# Altium PCB PCB.PcbDoc
Units mil, origin at the board's own origin, x right, y up, seen from the top; angles counter-clockwise.
Board outline 6000 x 4000 mil, 2 copper layers (Top Layer, Bottom Layer); 75 components, 67 nets, 266 pads, 0 vias.
Unrouted connection lines stored in the file: 1.
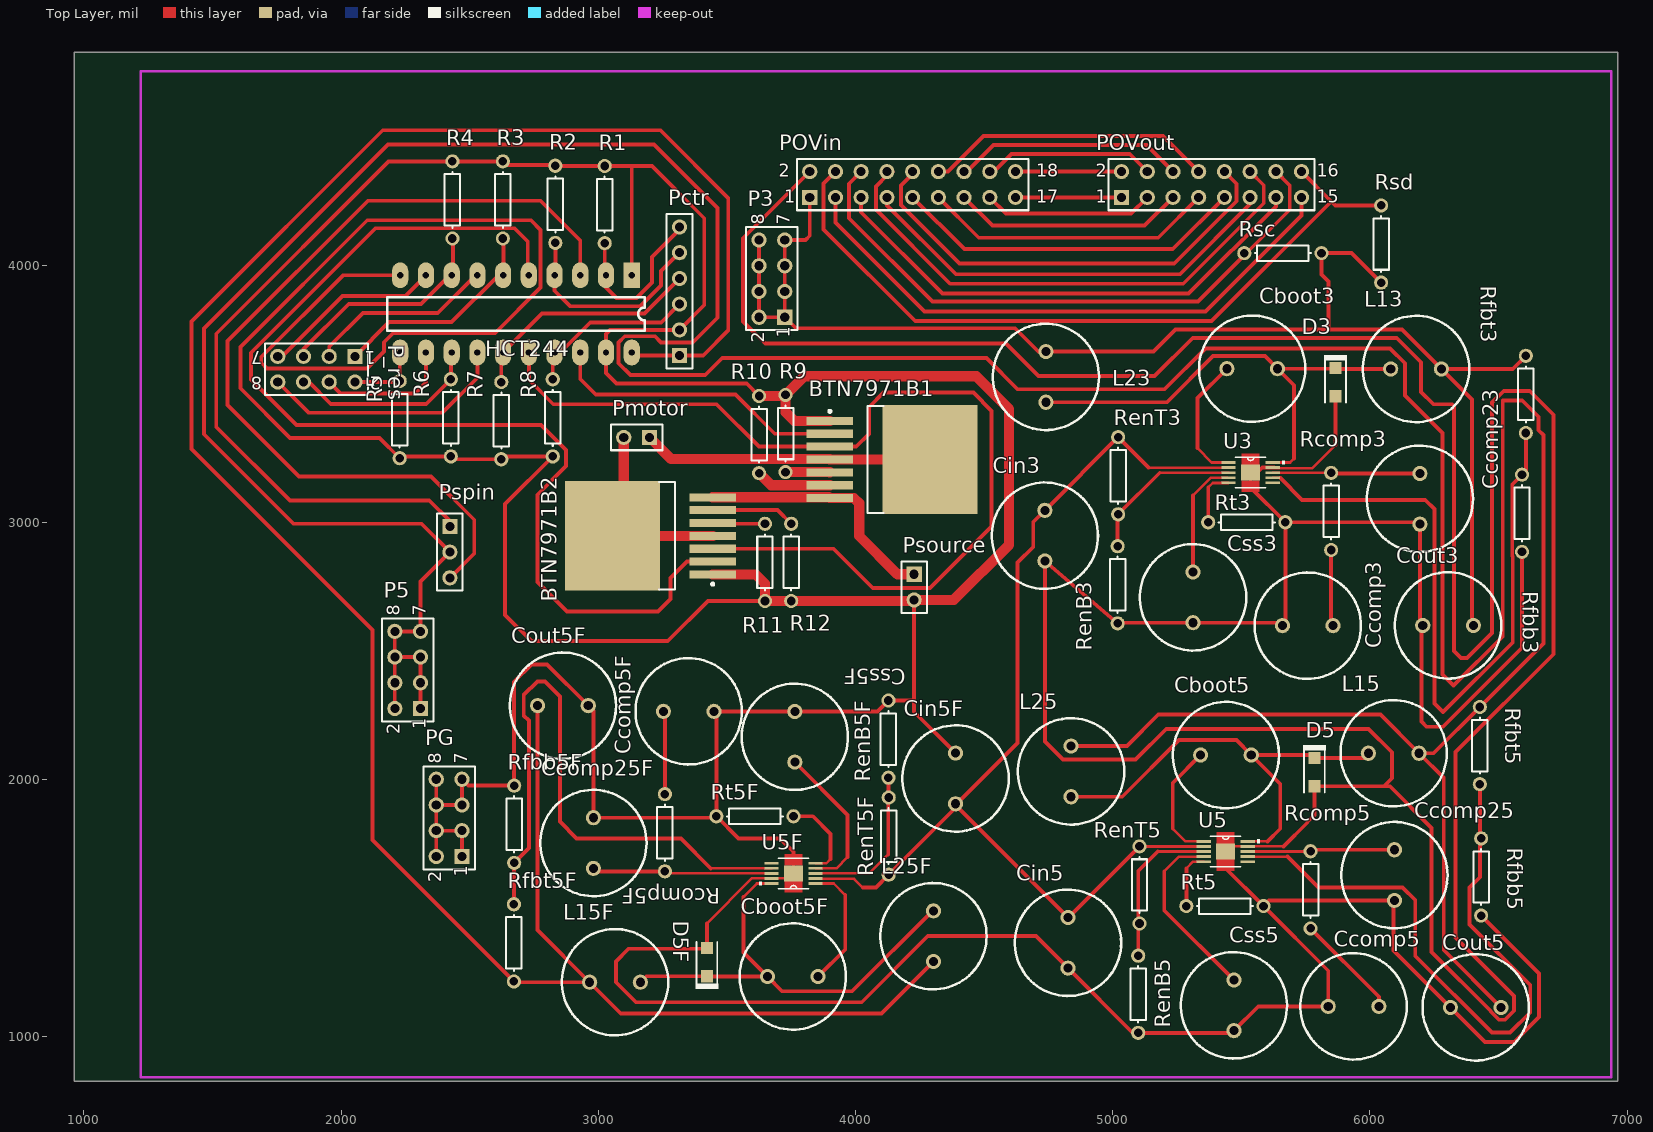
[diagram p0: Top Layer view]
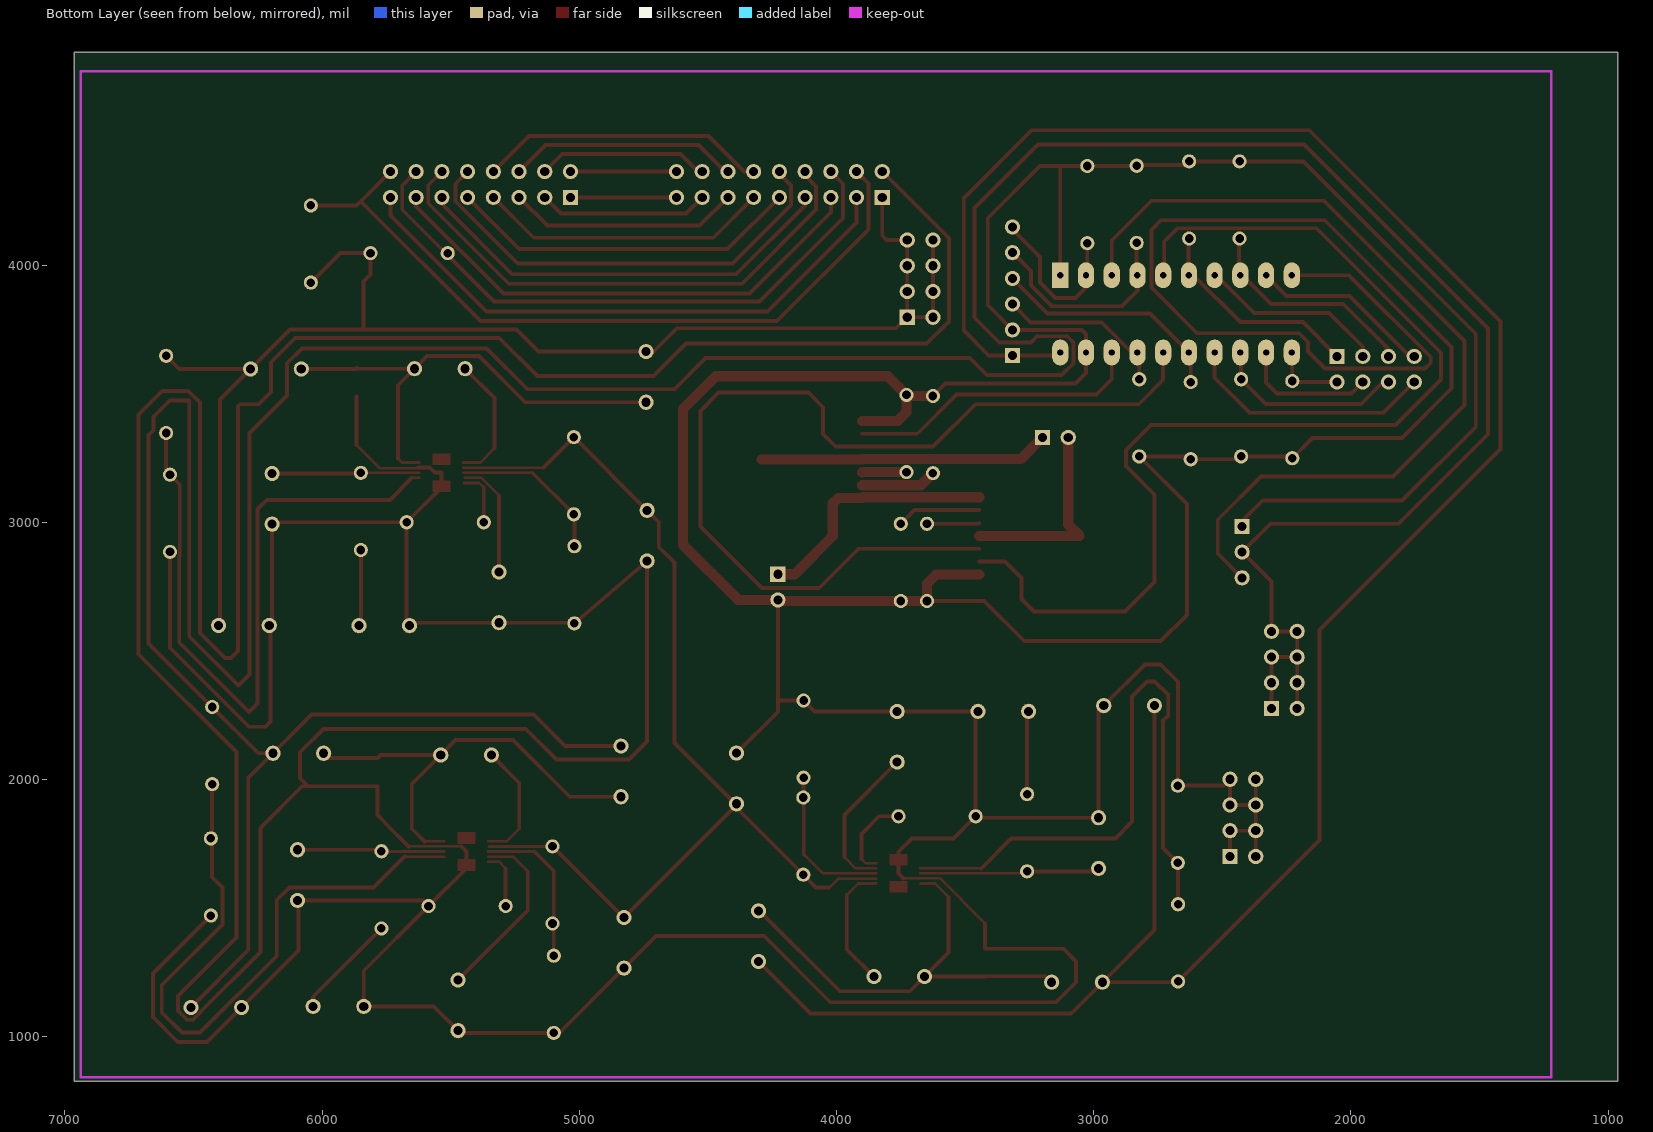
[diagram p1: Bottom Layer view, seen from below]

## Layer stack, top to bottom
Top Solder: solder mask 0.4, Solder Resist, Dk 3.5
Top Layer: signal copper 1.4
Dielectric 1: dielectric 12.6, FR-4, Dk 4.8
Bottom Layer: signal copper 1.4
Bottom Solder: solder mask 0.4, Solder Resist, Dk 3.5

## Board outline
963,828 6963,828 6963,4828 963,4828

## Design rules (kind name [scope] priority, off if disabled: settings)
Clearance [All] p1: gap=3 ignorepadtopadclearanceinfootprint=FALSE
PolygonConnect [All] p1: connectstyle=Relief reliefconductorwidth=10 reliefentries=4 polygonreliefangle="90 Angle" airgapwidth=10
RoomDefinition Motor [InComponentClass('Motor')] p1: confinementstyle=ConfineIn formatcopy=TRUE lockcomponents=FALSE outline 0,0 2000,0 2000,1000 0,1000
RoomDefinition connector [InComponentClass('connector')] p2: confinementstyle=ConfineIn formatcopy=TRUE lockcomponents=FALSE outline 0,0 2000,0 2000,1000 0,1000
RoomDefinition 5F [InComponentClass('5F')] p3: confinementstyle=ConfineIn formatcopy=TRUE lockcomponents=FALSE outline 0,0 2000,0 2000,1000 0,1000
RoomDefinition 5 [InComponentClass('5')] p4: confinementstyle=ConfineIn formatcopy=TRUE lockcomponents=FALSE outline 0,0 2000,0 2000,1000 0,1000
RoomDefinition 3V3 [InComponentClass('3V3')] p5: confinementstyle=ConfineIn formatcopy=TRUE lockcomponents=FALSE outline 0,0 2000,0 2000,1000 0,1000
RoutingLayers [All] p1: top layer_v5=TRUE bottom layer_v5=FALSE
RoutingVias [All] p1: holewidth=28 width=50 viastyle="Through Hole" minholewidth=28 minwidth=50 maxholewidth=28 maxwidth=50
SolderMaskExpansion [All] p1: expansion=4
Width [All] p1: maxlimit=50 minlimit=10 preferedwidth=15 bottomlayer_maxwidth=10 bottomlayer_prefwidth=10 minimp=50.000000 maximp=50.000000 favimp=50.000000
29 further rules are at their usual default settings.

## Classes and differential pairs
component class connector: P3 P5 PG POVin POVout Psource Rsc Rsd
component class Motor: BTN7971B1 BTN7971B2 HCT244 P_res Pctr Pmotor Pspin R1 R2 R3 R4 R5 R6 R7 R8 R9 R10 R11 R12
component class 3V3: Cboot3 Ccomp3 Ccomp23 Cin3 Cout3 Css3 D3 L13 L23 Rcomp3 RenB3 RenT3 Rfbb3 Rfbt3 Rt3 U3
component class 5: Cboot5 Ccomp5 Ccomp25 Cin5 Cout5 Css5 D5 L15 L25 Rcomp5 RenB5 RenT5 Rfbb5 Rfbt5 Rt5 U5
component class 5F: Cboot5F Ccomp5F Ccomp25F Cin5F Cout5F Css5F D5F L15F L25F Rcomp5F RenB5F RenT5F Rfbb5F Rfbt5F Rt5F U5F

## Components (designator, comment, footprint, x,y, rotation, side; value= is the part's Value field where it differs from the comment)
BTN7971B1 "BTN" BTN7971B 4142.36,3245 r0 top
BTN7971B2 "BTN" BTN7971B 3202.64,2948 r180 top
Cboot3 "Cap" RB5-10.5 5542,3598 r0 top value=100nF
Cboot5 "Cap" RB5-10.5 5440,2096 r0 top value=100nF
Cboot5F "Cap" RB5-10.5 3756,1235 r180 top value=100nF
Ccomp3 "Cap" RB5-10.5 5758,2599 r0 top value=1nF
Ccomp5 "Cap" RB5-10.5 5936,1119 r0 top value=1nF
Ccomp5F "Cap" RB5-10.5 3351.43,2266 r180 top value=1nF
Ccomp23 "Cap" RB5-10.5 6194,3092 r90 top value=10pF
Ccomp25 "Cap" RB5-10.5 6095,1629.43 r90 top value=10pF
Ccomp25F "Cap" RB5-10.5 2981,1754 r270 top value=10pF
Cin3 "Cap Pol1" RB5-10.5 4736,2949 r270 top value=470uF
Cin5 "Cap Pol1" RB5-10.5 4826,1366 r270 top value=470uF
Cin5F "Cap Pol1" RB5-10.5 4389,2005 r90 top value=470uF
Cout3 "Cap Pol1" RB5-10.5 6303.57,2600 r180 top value=470uF
Cout5 "Cap Pol1" RB5-10.5 6411,1115 r180 top value=470uF
Cout5F "Cap Pol1" RB5-10.5 2862.57,2288 r0 top value=470uF
Css3 "Cap" RB5-10.5 5312,2709 r90 top value=6.8nF
Css5 "Cap" RB5-10.5 5471,1123 r90 top value=6.8nF
Css5F "Cap" RB5-10.5 3764,2167 r270 top value=6.8nF
D3 "SS24FL" SOD-123F 5866,3546 r270 top value=Value
D5 "SS24FL" SOD-123F 5784,2029.88 r270 top value=Value
D5F "SS24FL" SOD-123F 3422,1291 r90 top value=Value
HCT244 "HCT244" DIP20 3130,3961 r270 top
L13 "Inductor" RB5-10.5 6179,3597 r0 top value=100uH
L15 "Inductor" RB5-10.5 6092,2103 r0 top value=100uH
L15F "Inductor" RB5-10.5 3065,1213 r180 top value=100uH
L23 "Inductor" RB5-10.5 4740,3566 r90 top value=100uH
L25 "Inductor" RB5-10.5 4838,2032.43 r90 top value=100uH
L25F "Inductor" RB5-10.5 4303,1392 r270 top value=100uH
P3 "Header 4X2" HDR2X4 3725,3798 r90 top
P5 "Header 4X2" HDR2X4 2309,2277 r90 top
P_res "Header 4X2" HDR2X4 2054,3646 r180 top
Pctr "Header 6" HDR1X6 3316,3649 r90 top
PG "Header 4X2" HDR2X4 2470,1702 r90 top
Pmotor "Header 2" HDR1X2 3199,3331 r180 top
POVin "Header 9X2" HDR2X9 3822,4264 r0 top
POVout "Header 8X2" HDR2X8 5034,4264 r0 top
Psource "Header 2" HDR1X2 4228,2799 r270 top
Pspin "Header 3" HDR1X3 2423,2985 r270 top
R1 "Res1" AXIAL-0.3 3025,4236 r270 top value=1K
R2 "Res1" AXIAL-0.3 2833,4237 r270 top value=1K
R3 "Res1" AXIAL-0.3 2629,4254 r270 top value=1K
R4 "Res1" AXIAL-0.3 2433,4254 r270 top value=1K
R5 "Res1" AXIAL-0.3 2228,3400 r90 top value=1K
R6 "Res1" AXIAL-0.3 2427,3407 r90 top value=1K
R7 "Res1" AXIAL-0.3 2623,3396 r90 top value=1K
R8 "Res1" AXIAL-0.3 2823,3407 r90 top value=1K
R9 "Res1" AXIAL-0.3 3728,3346 r270 top value=1K
R10 "Res1" AXIAL-0.3 3625,3342 r270 top value=1K
R11 "Res1" AXIAL-0.3 3648,2845 r90 top value=1K
R12 "Res1" AXIAL-0.3 3750,2845 r90 top value=1K
Rcomp3 "Res1" AXIAL-0.3 5849,3043 r90 top value=33K
Rcomp5 "Res1" AXIAL-0.3 5769,1572 r90 top value=56K
Rcomp5F "Res1" AXIAL-0.3 3259,1794 r270 top value=56K
RenB3 "Res1" AXIAL-0.3 5019,2758 r90 top value=33K
RenB5 "Res1" AXIAL-0.3 5099,1166 r90 top value=33K
RenB5F "Res1" AXIAL-0.3 4128,2158 r270 top value=33K
RenT3 "Res1" AXIAL-0.3 5021,3182 r90 top value=110K
RenT5 "Res1" AXIAL-0.3 5104,1591 r90 top value=110K
RenT5F "Res1" AXIAL-0.3 4129,1781 r270 top value=110K
Rfbb3 "Res1" AXIAL-0.3 6591,3036 r90 top value=10k
Rfbb5 "Res1" AXIAL-0.3 6432,1622 r90 top value=10k
Rfbb5F "Res1" AXIAL-0.3 2673,1827 r270 top value=10k
Rfbt3 "Res1" AXIAL-0.3 6606,3498 r90 top value=33k
Rfbt5 "Res1" AXIAL-0.3 6427,2133 r90 top value=56k
Rfbt5F "Res1" AXIAL-0.3 2672,1366 r270 top value=56k
Rsc "Res1" AXIAL-0.3 5661.42,4047.24 r0 top value=1K
Rsd "Res1" AXIAL-0.3 6043.31,4082.68 r270 top value=1K
Rt3 "Res1" AXIAL-0.3 5521,3001 r180 top value=110K
Rt5 "Res1" AXIAL-0.3 5436,1509 r180 top value=110K
Rt5F "Res1" AXIAL-0.3 3609,1858 r0 top value=110K
U3 "TPS54160DGQR" S-PDSO-G10-1 5536,3194 r0 top value=Value
U5 "TPS54160DGQR" S-PDSO-G10-1 5439,1721 r0 top value=Value
U5F "TPS54160DGQR" S-PDSO-G10-1 3759,1636 r180 top value=Value

## Footprints (in the part's own frame and the unit in brackets; to place one, negate y for a bottom-side part, rotate by r counter-clockwise, add the part's x,y. Pads: shape width x height; smd on the part's side, far side on the other; paste and mask are expansions set on the pad)
AXIAL-0.3 [mm] "Axial Device, Thru-Hole; 2 Leads; 0.3 in Pin Spacing"
  round 1.4 hole 0.85: 1(-3.81,0) 2(3.81,0)
  silkscreen extent -2.77,-0.76 2.77,0.76
BTN7971B [mm]
  rect 4.6x0.8 smd: 1(-6.15,3.81) 2(-6.15,2.54) 3(-6.15,1.27) 4(-6.15,0) 5(-6.15,-1.27) 6(-6.15,-2.54) 7(-6.15,-3.81)
  rect 9.4x10.8 smd: 8(3.75,0)
  silkscreen extent -6.27,-5.3 -0.85,5.3
DIP20 [mm]
  rect 2.54x1.6 hole 0.635: 1(0,0)
  oval 2.54x1.6 hole 0.635: 2(0,-2.54) 3(0,-5.08) 4(0,-7.62) 5(0,-10.16) 6(0,-12.7) 7(0,-15.24) 8(0,-17.78) 9(0,-20.32) 10(0,-22.86) 11(7.62,-22.86) 12(7.62,-20.32) 13(7.62,-17.78) 14(7.62,-15.24) 15(7.62,-12.7) 16(7.62,-10.16) 17(7.62,-7.62) 18(7.62,-5.08) 19(7.62,-2.54) 20(7.62,0)
  silkscreen extent 2.16,-24.13 5.46,1.27
HDR1X2 [mm] "Connector; Header; 2 Position"
  rect 1.5x1.5 hole 0.9: 1(0,0)
  round 1.5 hole 0.9: 2(2.54,0)
  silkscreen extent -1.27,-1.27 3.81,1.27
HDR1X3 [mm] "Connector; Header; 3 Position"
  rect 1.5x1.5 hole 0.9: 1(0,0)
  round 1.5 hole 0.9: 2(2.54,0) 3(5.08,0)
  silkscreen extent -1.27,-1.27 6.35,1.27
HDR1X6 [mm] "Connector; Header; 6 Position"
  rect 1.5x1.5 hole 0.9: 1(0,0)
  round 1.5 hole 0.9: 2(2.54,0) 3(5.08,0) 4(7.62,0) 5(10.16,0) 6(12.7,0)
  silkscreen extent -1.27,-1.27 13.97,1.27
HDR2X4 [mm] "Connector; Header; 4x2 Position"
  rect 1.5x1.5 hole 0.9: 1(0,0)
  round 1.5 hole 0.9: 2(0,2.54) 3(2.54,0) 4(2.54,2.54) 5(5.08,0) 6(5.08,2.54) 7(7.62,0) 8(7.62,2.54)
  silkscreen extent -1.27,-1.27 8.89,3.81
HDR2X8 [mm] "Connector; Header; 8x2 Position"
  rect 1.5x1.5 hole 0.9: 1(0,0)
  round 1.5 hole 0.9: 2(0,2.54) 3(2.54,0) 4(2.54,2.54) 5(5.08,0) 6(5.08,2.54) 7(7.62,0) 8(7.62,2.54) 9(10.16,0) 10(10.16,2.54) 11(12.7,0) 12(12.7,2.54) 13(15.24,0) 14(15.24,2.54) 15(17.78,0) 16(17.78,2.54)
  silkscreen extent -1.27,-1.27 19.05,3.81
HDR2X9 [mm] "Connector; Header; 9x2 Position"
  rect 1.5x1.5 hole 0.9: 1(0,0)
  round 1.5 hole 0.9: 2(0,2.54) 3(2.54,0) 4(2.54,2.54) 5(5.08,0) 6(5.08,2.54) 7(7.62,0) 8(7.62,2.54) 9(10.16,0) 10(10.16,2.54) 11(12.7,0) 12(12.7,2.54) 13(15.24,0) 14(15.24,2.54) 15(17.78,0) 16(17.78,2.54) 17(20.32,0) 18(20.32,2.54)
  silkscreen extent -1.27,-1.27 21.59,3.81
RB5-10.5 [mm] "Capacitor (Radial); 2 Leads"
  round 1.5 hole 0.9: 1(-2.5,0) 2(2.5,0)
  silkscreen extent -5.25,-5.25 5.25,5.25
S-PDSO-G10-1 [mm]
  rect 1.411x0.27 smd: 1(-2.175,1) 2(-2.175,0.5) 3(-2.175,0) 4(-2.175,-0.5) 5(-2.175,-1) 6(2.175,-1) 7(2.175,-0.5) 8(2.175,0) 9(2.175,0.5) 10(2.175,1)
  rect 1.88x1.57 smd paste-0.927: 11(0,0)
  Top Layer region: -0.889,0.762 0.889,0.762 0.889,1.905 -0.889,1.905
  Top Layer region: -0.889,-1.905 0.889,-1.905 0.889,-0.762 -0.889,-0.762
  silkscreen extent -1.5,-1.5 3.39,1.5
SOD-123F [mm]
  rect 1.2x1.2 smd paste-0.05 mask+0.051: 1(-1.4,0) 2(1.4,0)
  silkscreen extent -2.64,-1.12 2.01,1.12

## Part data
Cboot3 Cboot5 Cboot5F Ccomp3 Ccomp5 Ccomp5F Ccomp23 Ccomp25 Ccomp25F Css3 Css5 Css5F: "Capacitor", LatestRevisionDate=17-Jul-2002, LatestRevisionNote="Re-released for DXP Platform.", PackageDescription="Radial Cap, Thru-Hole; 2 Leads; 0.3 in Pin Spacing", PackageReference=RAD-0.3, Published=8-Jun-2000, Publisher="Altium Limited"
Cin3 Cin5 Cin5F Cout3 Cout5 Cout5F: "Polarized Capacitor (Radial)", LatestRevisionDate=17-Jul-2002, LatestRevisionNote="Re-released for DXP Platform.", PackageDescription="Polarized Capacitor (Radial); 2 Leads", PackageReference=RB7.6-15, Published=8-Jun-2000, Publisher="Altium Limited"
D3 D5 D5F: "Imported", Manufacturer_Name="Fairchild Semiconductor", Manufacturer_Part_Number=SS24FL, RefDes=RefDes, TYPE=TYPE, Vendor="Fairchild Semiconductor"
P3 P5 P_res PG: "Header, 4-Pin, Dual row", LatestRevisionDate=17-Jul-2002, LatestRevisionNote="Re-released for DXP Platform.", Publisher="Altium Limited"
Pctr: "Header, 6-Pin", LatestRevisionDate=17-Jul-2002, LatestRevisionNote="Re-released for DXP Platform.", Publisher="Altium Limited"
Pmotor Psource: "Header, 2-Pin", LatestRevisionDate=17-Jul-2002, LatestRevisionNote="Re-released for DXP Platform.", Publisher="Altium Limited"
POVin: "Header, 9-Pin, Dual row", LatestRevisionDate=17-Jul-2002, LatestRevisionNote="Re-released for DXP Platform.", Publisher="Altium Limited"
POVout: "Header, 8-Pin, Dual row", LatestRevisionDate=17-Jul-2002, LatestRevisionNote="Re-released for DXP Platform.", Publisher="Altium Limited"
Pspin: "Header, 3-Pin", LatestRevisionDate=17-Jul-2002, LatestRevisionNote="Re-released for DXP Platform.", Publisher="Altium Limited"
R1 R2 R3 R4 R5 R6 R7 R8 R9 R10 R11 R12 Rcomp3 Rcomp5 Rcomp5F RenB3 RenB5 RenB5F RenT3 RenT5 RenT5F Rfbb3 Rfbb5 Rfbb5F Rfbt3 Rfbt5 Rfbt5F Rsc Rsd Rt3 Rt5 Rt5F: "Resistor", LatestRevisionDate=17-Jul-2002, LatestRevisionNote="Re-released for DXP Platform.", PackageDescription="Axial Device, Thru-Hole; 2 Leads; 0.3 in Pin Spacing", PackageReference=AXIAL-0.3, Published=8-Jun-2000, Publisher="Altium Limited"
U3 U5 U5F: "Imported", Manufacturer_Name="Texas Instruments", Manufacturer_Part_Number=TPS54140DGQR, RefDes=RefDes, TYPE=TYPE, Vendor="Texas Instruments"
L13 L15 L15F L23 L25 L25F: Code_IEC=1005, Code_JEITA=0402, LatestRevisionDate=29-May-2009, LatestRevisionNote="IPC-7351 Footprint Added.", PackageDescription="Chip Inductor", PackageReference=0402-A, Published=8-Jun-2000, Publisher="Altium Limited"

## Nets (pads, with @x,y where several pads share a name; then routed paths per layer and width w, separated by ;. In a path a pad name is that pad's centre, name@x,y a point inside that pad or via, vN(x,y) a via of type N, cw(c..) or ccw(c..) an arc to the next point about the centre after c; other vN are vias at no path point)
3V3: Cout3.1 L13.2 L23.2 P3.1 P3.2 P3.3 P3.4 P3.5 P3.6 P3.7 P3.8 POVin.1 Rfbt3.2 Rsc.2 Rsd.2 | length 5636.1
  Top Layer w15: P3.8 P3.6 P3.4 P3.2 P3.1 ; POVin.1 3822,4115 3805,4098 P3.7 P3.5 P3.3 P3.1 ; Rsd.2 5928.74,4047.24 Rsc.2 5811.42,3964.17 5838.58,3937.01 5838.58,3753.94 5842.52,3750 ; Cout3.1@6396.43,2609 6396.43,3478 L13.2 ; Rfbt3.2 6555,3597 L13.2 ; P3.1 3768,3755 4620,3755 4710.57,3664.43 L23.2 5158.43,3664.43 5244,3750 5842.52,3750 ; 5842.52,3750 6124.43,3750 L13.2
5: Cout5.1 L15.2 L25.2 P5.1 P5.2 P5.3 P5.4 P5.5 P5.6 P5.7 P5.8 Pspin.2 Rfbt5.2 | length 16019.1
  Top Layer w15: P5.2 P5.4 P5.6 ; P5.1 P5.3 P5.5 P5.6 ; L25.2 5054.85,2130.85 5177,2253 6040.43,2253 L15.2 ; Cout5.1 6287,1337.43 6287,2006.43 L15.2 ; P5.6 P5.8 P5.7 2309,2771 Pspin.2 2313,2995 1815,2995 1467,3343 1467,3754 2182,4469 3217,4469 3463,4223 3463,3796 3367,3700 3244,3700 3220,3724 3103,3724 3079,3700 3079,3619 3125,3573 3416,3573 3482,3639 4509,3639 4630,3518 5201,3518 5360,3677 6078,3677 6136,3619 6136,3494 6282.5,3347.5 6282.5,2408.5 6325,2366 6516,2557 6516,3474 6592,3474 6655,3411 6655,3358.89 6674,3339.89 6674,2530 Rfbt5.2 6247,2103 L15.2
5F: Cout5F.1 HCT244.20 L15F.2 L25F.2 Pctr.1 Rfbt5F.2 | length 9449.4
  Top Layer w15: Cout5F.1 2764.15,1415.43 L15F.2 ; HCT244.20 3142,3649 Pctr.1 3408,3649 3505,3746 3505,4262 3242,4525 2162,4525 1418,3781 1418,3286 2122,2582 2122,1766 Rfbt5F.2 2675,1213 L15F.2 ; L25F.2 4101.43,1092 3087.57,1092 L15F.2
GND: BTN7971B1.1 BTN7971B2.1 Ccomp3.1 Ccomp5.1 Ccomp5F.1 Ccomp23.1 Ccomp25.1 Ccomp25F.1 Cin3.2 Cin5.2 Cin5F.2 Cout3.2 Cout5.2 Cout5F.2 Css3.1 Css5.1 Css5F.1 D3.2 D5.2 D5F.2 HCT244.1 HCT244.10 HCT244.19 Pctr.2 PG.1 PG.2 PG.3 PG.4 PG.5 PG.6 PG.7 PG.8 POVin.2 Psource.2 Pspin.1 R1.1 R2.1 R3.1 R4.1 R5.1 R6.1 R7.1 R8.1 R9.1 R10.1 R11.1 R12.1 RenB3.1 RenB5.1 RenB5F.1 Rfbb3.1 Rfbb5.1 Rfbb5F.1 Rt3.1 Rt5.1 Rt5F.1 U3.9 U3.11 U5.9 U5.11 U5F.9 U5F.11 | length 44856
  Top Layer w10: 3422,1442 3596.32,1616.32 U5F.11@3739.32,1616.32 ; U5.11@5458.69,1740.68 U5.9 5663.69,1740.68 ; U3.9@5629.4,3211.69 5775.8,3211.69 5866,3301.88
  Top Layer w15: HCT244.10 2008,3961 1690,3643 1690,3621 1712,3599 2101,3599 2167,3665 2167,3701 2202,3736 2598,3736 2776,3914 2776,4137 2738,4175 2102,4175 1609,3682 1609,3522 1802,3329 2149,3329 R5.1 2235,3257 R6.1 2438,3246 R7.1 2634,3257 R8.1 2638,3072 2638,2641 2740,2539 3270,2539 3426,2695 R11.1 ; PG.2 PG.4 ; PG.8 PG.6 ; Pspin.1 2423,3006 2343,3086 1801,3086 1515,3372 1515,3734 2185,4404 R4.1 R3.1 2643,4390 2836,4390 2840,4386 R1.1 3130,4386 ; PG.1 PG.3 PG.4 ; HCT244.1 3130,4386 ; 3422,1442 D5F.2 3418.88,1343 3118,1343 3069,1294 3069,1213 3147,1135 4024,1135 4281,1392 4701.57,1392 Cin5.2 5077.57,1016 RenB5.1 5462.43,1016 Css5.1 5565.43,1119 Ccomp5.1 5837.57,1257.43 Rt5.1 ; Ccomp5F.1 Ccomp5F.1@3450.43,2265.43 ; R10.1 3577,3540 3071,3540 3030,3581 HCT244.19 3030,3733 3046,3749 Pctr.2 3412,3845 3412,4183 3209,4386 3130,4386 ; R9.1@3724,3492 R9.1 ; U5F.11@3739.32,1616.32 U5F.11 3759,1720 3707,1772 3545,1772 Rt5F.1 ; POVin.2@3826,4364 POVin.2 3563,4105 3563,3782 3649,3696 4585,3696 4712,3569 5162,3569 5311,3718 6104,3718 6199,3623 6199,3508 6247,3460 6319,3460 6327,3452 6327,2500 6354,2473 6377,2473 6475,2571 6475,3466 6520,3511 6621,3511 6713,3419 6713,2488 6333,2108 6333,1387 6560,1160 6560,1102 6525,1067 6500.82,1067 6469.4,1098.42 6469.4,1100.6 6239,1331 6239,1813 6077.24,1974.76 6053.76,1974.76 ; Psource.2 4228,2306 ; Cin5F.2 4228,2264.43 4228,2306 ; U5.11@5458.69,1740.68 U5.11 5439,1656 Rt5.1 ; U3.9@5627.4,3213.69 5581,3213.69 5561.31,3194 U3.11 5536,3136 Rt3.1 ; 5663.69,1740.69 5756,1833 5756,1835 5784,1863 D5.2 6053.76,1974.76 ; 5866,3301.88 D3.2 ; Rfbb5.1 6657,1247 6657,1077 6561,981 6446.57,981 Cout5.2 6091,1336.57 6091,1527 Ccomp25.1 5608,1531 Rt5.1 ; Rfbb3.1 6591,2513 6284,2206 6220,2206 6199.57,2226.43 6199.57,2609 6194,2614.57 Ccomp23.1 6186.57,3001 Rt3.1 ; PG.4 PG.6 ; PG.6 PG.5 PG.7 2495,1977 Rfbb5F.1 2673,2381 2740,2448 2801,2448 Cout5F.2 2981,2268 Ccomp25F.1 3453.43,1852.43 Rt5F.1 ; Ccomp5F.1@3450.43,2265.43 Css5F.1 4085.43,2265.43 RenB5F.1 4226,2308 4228,2306 ; Ccomp5F.1@3450.43,2265.43 3459,2256.85 Rt5F.1 ; Rt3.1 5671,2600.43 5660.57,2590 5640,2610.57 Css3.1 5021.57,2610.57 RenB3.1 Cin3.2 4736,2149 4806,2079 5089,2079 5208,2198 5994,2198 6085,2107 6085,2006 6053.76,1974.76
  Top Layer w40: BTN7971B2.1 3612,2798 3648,2762 R11.1 R12.1 4224,2695 Psource.2 4382,2699 4597,2914 4597,3441 4469,3569 3801,3569 R9.1 3728,3429 3762,3395 BTN7971B1.1 ; R10.1 R9.1@3724,3492
NetBTN7971B1_2: BTN7971B1.2 HCT244.18 | length 1161.5
  Top Layer w15: HCT244.18 2930,3558 2990,3498 3533,3498 3686,3345 BTN7971B1.2
NetBTN7971B1_3: BTN7971B1.3 BTN7971B2.3 HCT244.16 | length 3885.2
  Top Layer w15: HCT244.16 2730,3555 2825,3460 3460,3460 3625,3295 BTN7971B1.3 4003,3295 4052,3344 4052,3448 4109,3505 4458,3505 4529,3434 4529,2985 4290,2746 4067,2746 3915,2898 BTN7971B2.3
NetBTN7971B1_4: BTN7971B1.4 BTN7971B1.8 Pmotor.1 | length 1127.5
  Top Layer w40: Pmotor.1 3283.44,3246.56 3900.24,3246.56 BTN7971B1.4 BTN7971B1.8
NetBTN7971B1_5: BTN7971B1.5 R9.2 | length 172.7
  Top Layer w40: R9.2 3899.24,3196 BTN7971B1.5
NetBTN7971B1_6: BTN7971B1.6 R10.2 | length 294.7
  Top Layer w40: R10.2 3672,3145 BTN7971B1.6
NetBTN7971B2_2: BTN7971B2.2 HCT244.5 | length 4288.4
  Top Layer w15: HCT244.5 2726,3965 2726,4092 2674,4144 2134,4144 1650,3660 1650,3556 1827,3379 2778,3379 2875,3282 2875,3219 2764,3108 2764,2769 2879,2654 3232,2654 3281,2703 3281,2784 3345,2848 BTN7971B2.2
NetBTN7971B2_4: BTN7971B2.4 BTN7971B2.8 Pmotor.2 | length 791
  Top Layer w40: Pmotor.2 3099,2992 BTN7971B2.8 BTN7971B2.4
NetBTN7971B2_5: BTN7971B2.5 R11.2 | length 204.5
  Top Layer w15: BTN7971B2.5 3447.76,2995 R11.2
NetBTN7971B2_6: BTN7971B2.6 R12.2 | length 327.2
  Top Layer w15: BTN7971B2.6 3697,3048 R12.2
NetCboot3_1: Cboot3.1 U3.1 | length 500.9
  Top Layer w10: 5329,3289 5384.63,3233.37 U3.1
  Top Layer w15: 5329,3289 5329,3483.43 Cboot3.1
NetCboot3_2: Cboot3.2 D3.1 L13.1 L23.1 U3.10 | length 1903.8
  Top Layer w10: U3.10 5689.37,3233.37 5705,3249
  Top Layer w15: L23.1 5210.57,3467.57 5390,3647 5591.43,3647 Cboot3.2 ; 5705,3249 5705,3533.43 Cboot3.2 ; L13.1 5870.12,3597 D3.1 5862.88,3598 Cboot3.2
NetCboot5_1: Cboot5.1 U5.1 | length 471.3
  Top Layer w10: 5233,1811 5283.63,1760.37 U5.1
  Top Layer w15: 5233,1811 5233,1987.43 Cboot5.1
NetCboot5_2: Cboot5.2 D5.1 L15.1 L25.1 U5.10 | length 1762.4
  Top Layer w10: U5.10 5601.63,1760.37
  Top Layer w15: L25.1 5037,1934 5257,2154 5480.43,2154 Cboot5.2 ; 5601.63,1760.37 5651,1809.74 5651,1983.43 Cboot5.2 ; L15.1 5975.57,2085 D5.1 5773,2096 Cboot5.2
NetCboot5F_1: Cboot5F.1 U5F.1 | length 494.6
  Top Layer w10: U5F.1 3915.37,1596.63 3960,1552
  Top Layer w15: Cboot5F.1 3960,1340.57 3960,1552
NetCboot5F_2: Cboot5F.2 D5F.1 L15F.1 L25F.1 U5F.10 | length 1781.4
  Top Layer w10: 3564,1544 3616.63,1596.63 U5F.10
  Top Layer w15: L15F.1 3186.31,1235.88 D5F.1 3422.88,1235 Cboot5F.2 ; 3564,1544 3564,1328.57 Cboot5F.2 ; L25F.1 4299.43,1490.43 3987,1178 3714.57,1178 Cboot5F.2
NetCcomp3_2: Ccomp3.2 Rcomp3.1 | length 306.5
  Top Layer w15: Rcomp3.1 5849,2598.43 Ccomp3.2@5857.43,2590
NetCcomp5_2: Ccomp5.2 Rcomp5.1 | length 412.9
  Top Layer w15: Rcomp5.1 6034.43,1156.57 Ccomp5.2
NetCcomp5F_2: Ccomp5F.2 Rcomp5F.1 | length 324.5
  Top Layer w15: Ccomp5F.2 3259,2260 Rcomp5F.1
NetCcomp23_2: Ccomp23.2 Rcomp3.2 U3.8 | length 573.7
  Top Layer w10: U3.8@5621.63,3193.69 Rcomp3.2@5848.31,3193.69
  Top Layer w15: Rcomp3.2@5848.31,3193.69 Rcomp3.2 5851.57,3190.43 Ccomp23.2
NetCcomp25_2: Ccomp25.2 Rcomp5.2 U5.8 | length 573.2
  Top Layer w10: U5.8 Rcomp5.2@5768,1721
  Top Layer w15: Rcomp5.2@5768,1721 Rcomp5.2 5774.85,1727.85 Ccomp25.2
NetCcomp25F_2: Ccomp25F.2 Rcomp5F.2 U5F.8 | length 700.5
  Top Layer w10: Rcomp5F.2@3267,1636 U5F.8
  Top Layer w15: Ccomp25F.2 2992.57,1644 Rcomp5F.2 Rcomp5F.2@3267,1636
NetCss3_2: Css3.2 U3.4 | length 458.2
  Top Layer w10: 5312,3105.28 5380.4,3173.69 U3.4@5444,3173.69
  Top Layer w15: Css3.2 5312,3105.28
NetCss5_2: Css5.2 U5.4 | length 711.4
  Top Layer w10: 5200,1643 5258.32,1701.32 U5.4
  Top Layer w15: 5200,1643 5200,1492.43 Css5.2
NetCss5F_2: Css5F.2 U5F.4 | length 596.8
  Top Layer w10: U5F.4 3925.69,1655.69 3969,1699
  Top Layer w15: Css5F.2 3969,1863.57 3969,1699
NetHCT244_2: HCT244.2 Pctr.6 R1.2 | length 655
  Top Layer w15: R1.2 3025,3966 HCT244.2 3030,3914 3071,3873 3148.59,3873 3208.66,3933.07 3208.66,4031.66 3316,4139 Pctr.6
NetHCT244_3: HCT244.3 Pspin.3 | length 3454
  Top Layer w15: Pspin.3 2518,2880 2518,3011 2350,3179 1837,3179 1559,3457 1559,3705 2105,4251 2776,4251 2930,4097 HCT244.3
NetHCT244_4: HCT244.4 Pctr.5 R2.2 | length 817
  Top Layer w15: R2.2 2833,3964 HCT244.4 2830,3901 2890,3841 3163.83,3841 3244.09,3921.26 3244.09,3977.09 Pctr.5
NetHCT244_6: HCT244.6 P_res.1 R3.2 | length 849.9
  Top Layer w15: P_res.1 2187,3779 2430,3779 2612,3961 HCT244.6 2631,3962 R3.2@2631,4104
NetHCT244_7: HCT244.7 P_res.3 | length 728.7
  Top Layer w15: P_res.3 1954,3684 2085,3815 2376,3815 2522,3961 HCT244.7
NetHCT244_8: HCT244.8 P_res.5 R4.2 | length 869.4
  Top Layer w15: P_res.5 1854,3674 2030,3850 2311,3850 2422,3961 HCT244.8 2435,3966 R4.2@2435,4104 ; R4.2@2432,4103 R4.2
NetHCT244_9: HCT244.9 P_res.7 | length 706.5
  Top Layer w15: P_res.7 1771,3646 2006,3881 2250,3881 HCT244.9
NetHCT244_11: HCT244.11 P_res.2 R5.2 | length 287.5
  Top Layer w15: P_res.2 2224,3546 R5.2 2228,3659 HCT244.11
NetHCT244_12: HCT244.12 P_res.4 | length 528
  Top Layer w15: P_res.4 1998,3502 2287,3502 2330,3545 HCT244.12
NetHCT244_13: HCT244.13 P_res.6 R6.2 | length 753.2
  Top Layer w15: P_res.6 1875,3546 1960,3461 2331,3461 R6.2 2427,3658 HCT244.13
NetHCT244_14: HCT244.14 P_res.8 | length 979.6
  Top Layer w15: P_res.8 1873,3427 2394,3427 2530,3563 HCT244.14
NetHCT244_15: HCT244.15 Pctr.4 R7.2 | length 923.2
  Top Layer w15: R7.2 2623,3654 HCT244.15 2781,3812 3179,3812 Pctr.4
NetHCT244_17: HCT244.17 Pctr.3 R8.2 | length 670.8
  Top Layer w15: R8.2 2823,3654 HCT244.17 2852,3661 2969,3778 3245,3778 Pctr.3
NetPOVin_3: POVin.3 POVout.15 | length 2276.8
  Top Layer w15: POVin.3 3922,4167 4268,3821 5361,3821 5734,4194 POVout.15
NetPOVin_4: POVin.4 POVout.16 Rsd.1 | length 2943.1
  Top Layer w15: POVin.4 3876,4318 3876,4139 4232,3783 5384,3783 5849.5,4248.5 ; POVout.16@5734,4385.54 POVout.16 5849.5,4248.5 ; Rsd.1 5865.32,4232.68 5849.5,4248.5
NetPOVin_5: POVin.5 POVout.13 | length 1976.3
  Top Layer w15: POVin.5 4022,4206 4338,3890 5295,3890 5634,4229 POVout.13
NetPOVin_6: POVin.6 POVout.14 Rsc.1 | length 2365.9
  Top Layer w15: POVin.6 3975,4317 3975,4183 4299,3859 5331,3859 5688,4216 5688,4310 POVout.14
NetPOVin_7: POVin.7 POVout.11 | length 1693.1
  Top Layer w15: POVin.7 4122,4233 4390,3965 5261,3965 5534,4238 POVout.11
NetPOVin_8: POVin.8 POVout.12 | length 2090.1
  Top Layer w15: POVin.8@4145,4364 POVin.8 4122,4350 4079,4307 4079,4217 4368,3928 5274,3928 5587,4241 5587,4311 POVout.12
NetPOVin_9: POVin.9 POVout.9 | length 1378.5
  Top Layer w15: POVin.9 4423,4063 5233,4063 POVout.9
NetPOVin_10: POVin.10 POVout.10 | length 1781.4
  Top Layer w15: POVin.10 4222,4355 4177,4310 4177,4234 4404,4007 5239,4007 5481,4249 5481,4317 POVout.10
NetPOVin_11: POVin.11 POVout.7 | length 1142.1
  Top Layer w15: POVin.11 4479,4107 5177,4107 POVout.7
NetPOVin_12: POVin.12 POVout.8 | length 1127.2
  Top Layer w15: POVin.12 4359,4364 4498,4503 5195,4503 POVout.8
NetPOVin_13: POVin.13 POVout.5 | length 903.1
  Top Layer w15: POVin.13 4532,4154 5124,4154 POVout.5
NetPOVin_14: POVin.14 POVout.6 | length 897.3
  Top Layer w15: POVin.14 4433,4364 4536,4467 5131,4467 POVout.6
NetPOVin_15: POVin.15 POVout.3 | length 664.2
  Top Layer w15: POVin.15 4585,4201 5071,4201 POVout.3
NetPOVin_16: POVin.16 POVout.4 | length 668.3
  Top Layer w15: POVin.16 4539,4364 4607,4432 5066,4432 POVout.4
NetPOVin_17: POVin.17 POVout.1 | length 412
  Top Layer w15: POVin.17 POVout.1
NetPOVin_18: POVin.18 POVout.2 | length 412
  Top Layer w15: POVin.18 POVout.2
NetRenB3_2: RenB3.2 RenT3.1 U3.3 | length 621.2
  Top Layer w10: 5182.69,3193.69 U3.3@5450.37,3193.69
  Top Layer w15: RenB3.2 5019,3030 RenT3.1 5182.69,3193.69
NetRenB5_2: RenB5.2 RenT5.1 U5.3 | length 614.9
  Top Layer w10: 5175,1721 U5.3
  Top Layer w15: RenB5.2 5099,1645 5175,1721
NetRenB5F_2: RenB5F.2 RenT5F.1 U5F.3 | length 612.3
  Top Layer w10: U5F.3 4053,1636 4127,1710
  Top Layer w15: 4127,1710 4127,1929 RenT5F.1 4128,1932 RenB5F.2
NetRfbb3_2: Rfbb3.2 Rfbt3.1 U3.7 | length 2701.8
  Top Layer w10: U3.7 5649.89,3174.32
  Top Layer w15: 5649.89,3174.32 5736.2,3088 6215,3088 6251,3052 6251,2297 6284.5,2263.5 6555,2534 6555,2868.18 6552.94,2870.24 6552.94,3147.94 Rfbb3.2 6606,3201 Rfbt3.1
NetRfbb5_2: Rfbb5.2 Rfbt5.1 U5.7 | length 2543.6
  Top Layer w10: U5.7 5679.69,1701.32
  Top Layer w15: 5679.69,1701.32 5800,1581 6127,1581 6176,1532 6176,1315 6474,1017 6545,1017 6623,1095 6623,1202 6387,1438 6387,1581 6427,1621 Rfbt5.1
NetRfbb5F_2: Rfbb5F.2 Rfbt5F.1 U5F.7 | length 2416.8
  Top Layer w10: 3437.32,1655.69 U5F.7
  Top Layer w15: Rfbt5F.1 2672,1676 Rfbb5F.2 2730,1734 2730,2230 2710,2250 2710,2329 2763,2382 2793,2382 2851,2324 2851,1837 2916,1772 3321,1772 3437.32,1655.69
NetRt3_2: Rt3.2 U3.5 | length 220.8
  Top Layer w10: 5371,3136 5388.69,3153.69 U3.5@5449.43,3153.69
  Top Layer w15: Rt3.2 5371,3136
NetRt5_2: Rt5.2 U5.5 | length 225
  Top Layer w10: 5286,1656 5311.63,1681.63 U5.5
  Top Layer w15: Rt5.2 5286,1656
NetRt5F_2: Rt5F.2 U5F.5 | length 334.8
  Top Layer w10: U5F.5 3886.37,1675.37 3903,1692
  Top Layer w15: Rt5F.2 3834,1858 3903,1789 3903,1692
VCC: BTN7971B1.7 BTN7971B2.7 Cin3.1 Cin5.1 Cin5F.1 Psource.1 RenT3.2 RenT5.2 RenT5F.2 U3.2 U5.2 U5F.2 | length 5105.8
  Top Layer w10: U5F.2@3846.32,1614.63 3994.37,1614.63 4028,1581 ; RenT5.2@5104,1740.56 U5.2@5350.5,1740.56 ; 5139.31,3213.69 U3.2
  Top Layer w15: 4028,1581 4079,1581 RenT5F.2 4389,1891 Cin5F.1@4389,1901.43 ; RenT5F.2@4130.69,1613.32 RenT5F.2@4131,1613 ; RenT5.2@5104,1740.56 RenT5.2 4827.43,1464.43 Cin5.1 Cin5F.1@4389,1901.43 ; 5139.31,3213.69 RenT3.2 4738.21,3049.21 Cin3.1 4691,3002.43 4691,2905 4630,2844 4630,2142.43 Cin5F.1@4389,1901.43
  Top Layer w40: BTN7971B2.7 3897.24,3098 BTN7971B1.7 3994,3095 4014.5,3074.5 4014.5,2947.5 4163,2799 Psource.1
pads on no net: U3.6 U5.6 U5F.6

## Keep-outs
Keep-Out Layer:
  lines w10: 1221,843 1221,4755 6938,4755 6938,843 1221,843

## Text inside footprints (layer, text, board x,y; h text height)
P3: Top Overlay "8" at 3645,4158 h50 r90; Top Overlay "7" at 3745,4158 h50 r90; Top Overlay "1" at 3745,3718 h50 r90; Top Overlay "2" at 3645,3698 h50 r90
P5: Top Overlay "8" at 2229,2637 h50 r90; Top Overlay "7" at 2329,2637 h50 r90; Top Overlay "1" at 2329,2197 h50 r90; Top Overlay "2" at 2229,2177 h50 r90
P_res: Top Overlay "2" at 2154,3566 h50 r180; Top Overlay "1" at 2134,3666 h50 r180; Top Overlay "7" at 1694,3666 h50 r180; Top Overlay "8" at 1694,3566 h50 r180
PG: Top Overlay "8" at 2390,2062 h50 r90; Top Overlay "7" at 2490,2062 h50 r90; Top Overlay "1" at 2490,1622 h50 r90; Top Overlay "2" at 2390,1602 h50 r90
POVin: Top Overlay "2" at 3702,4344 h50; Top Overlay "1" at 3722,4244 h50; Top Overlay "17" at 4702,4244 h50; Top Overlay "18" at 4702,4344 h50
POVout: Top Overlay "16" at 5794,4344 h50; Top Overlay "15" at 5794,4244 h50; Top Overlay "1" at 4934,4244 h50; Top Overlay "2" at 4934,4344 h50